# Altium PCB WCTopping.PcbDoc (part 2 of 2)
Units mil, origin at the board's own origin, x right, y up, seen from the top; angles counter-clockwise.
Board outline 6000 x 4000 mil, 2 copper layers (Top Layer, Bottom Layer); 59 components, 76 nets, 281 pads, 0 vias.
Unrouted connection lines stored in the file: 177.
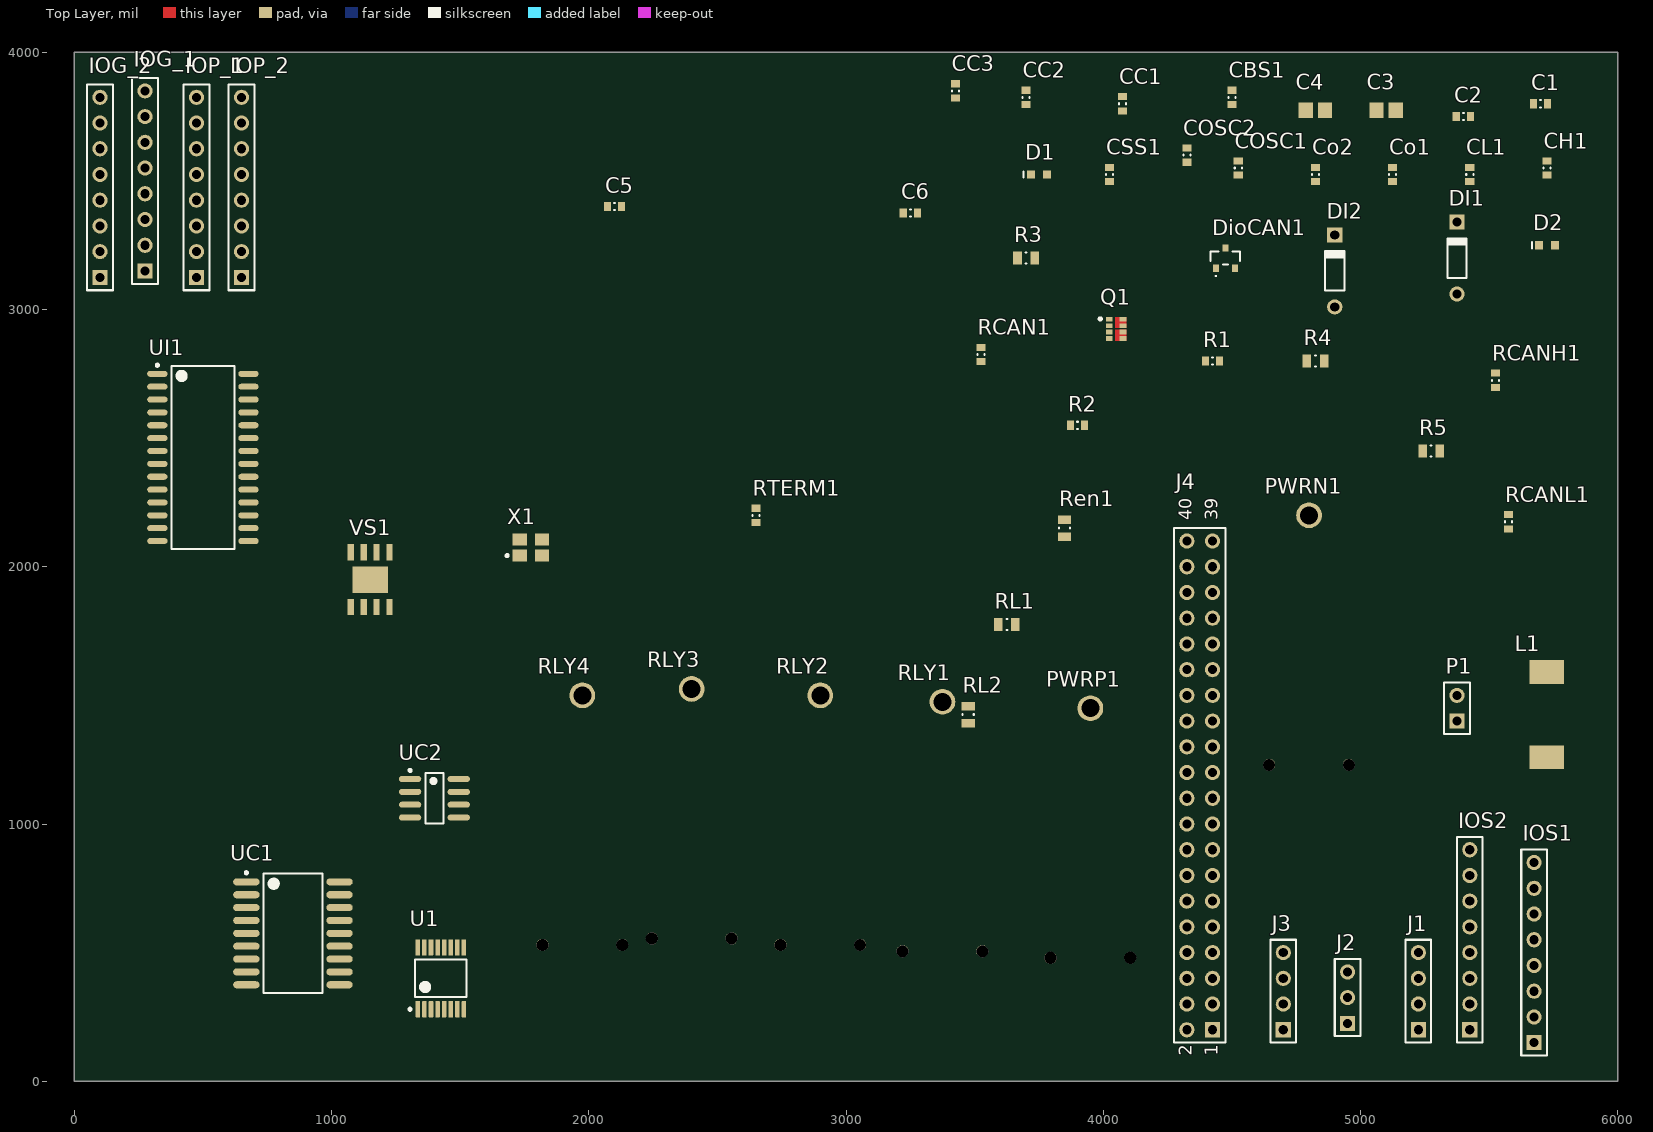
[diagram p0: Top Layer view]

## Part data (continued)
UC2: library part CMP-0186-00038-2, "High-Speed CAN Transceiver, 8-Pin SOIC, Extended Temperature", Code_IPC=SOIC127P600-8, Code_JEDEC=MS-012, ComponentLink1Description="Manufacturer URL", ComponentLink1URL=http://www.microchip.com/, ComponentLink2Description=Datasheet, ComponentLink2URL=http://ww1.microchip.com/downloads/en/DeviceDoc/21667F.pdf, ComponentLink3Description="Package Specification", ComponentLink3URL=http://www.microchip.com/stellent/groups/techpub_sg/documents/packagingspec/en012702.pdf, DatasheetVersion="revF, Jul-2010", PackageDescription="8-Lead Plastic Small Outline (SN) - Narrow, 3.90mm Body [SOIC]", PackageReference=SOIC-SN8, PackageVersion="revBB, Aug-2009", RevisionNote="URLs added. DatasheetVersion updated."
UI1: library part CMP-0186-00131-2, "16-Bit I/O Expander with Serial Interface, 28-Pin SOIC, Extended Temperature, Tape and Reel", Code_JEDEC=MS-013, ComponentLink1Description="Manufacturer URL", ComponentLink1URL=http://www.microchip.com/, ComponentLink2Description=Datasheet, ComponentLink2URL=http://ww1.microchip.com/downloads/en/DeviceDoc/21952b.pdf, ComponentLink3Description="Package Specification", ComponentLink3URL=http://www.microchip.com/stellent/groups/techpub_sg/documents/packagingspec/en012702.pdf, DatasheetVersion="revB, Feb-2007", PackageDescription="28-Lead Plastic Small Outline (SO) - Wide 7.50mm Body [SOIC]", PackageReference=SOIC-SO28, PackageVersion="revBB, Aug-2009", RevisionNote="URLs added. Sch pin type corrected."
VS1: Input Voltage MAX="23 V", Input Voltage MIN="4.75 V", Manufacturer="Monolithic Power Systems (MPS)", Manufacturer Part Number=MP2307DN-LF-Z, Maximum Operating Temperature="+ 85 C", Minimum Operating Temperature="- 40 C", Output Current="3 A", Output Voltage="0.925 V to 20 V", Package / Case="SOIC-8 EP", Supplier Part Number 1=946-MP2307DNLFZ, Supply Current="1.3 mA", Switching Frequency="340 kHz", Brand="Monolithic Power Systems (MPS)", ComponentLink1Description=https://datasheet.ciiva.com/12215/mp2307-r1-9-371737-12215450.pdf, ComponentLink1URL=https://datasheet.ciiva.com/12215/mp2307-r1-9-371737-12215450.pdf, Factory Pack Quantity=2500, Mounting Style=SMD/SMT, Number of Outputs="1 Output", Packaging=Reel, Pricing 1="1=4, 10=3.31, 50=3.31, 100=2.93, 1000=1.99, 10000=1.89 (USD)", Product Category="Voltage Regulators - Switching Regulators", RoHS=Details, Series=MP2307DN, Stock 1=1758, Supplier 1=Mouser, Topology=Buck, Type="Step-Down DC/DC Converter"
X1: library part CMP-0464-00001-2, "Crystal, 16 MHz, -30 to 85 degC, 3.2 x 2.5 x 0.9 mm SMD", Frequency Tolerance="+/-20 ppm", Load Capacitance="10 pF", Manufacturer=ITTI, Nominal Frequency="16 MHz", Operating Temperature="-30 to 85 degC", ComponentLink1Description="Manufacturer URL", ComponentLink1URL=http://www.itti-co.com, Drive Level="100 max. uw", Mounting Technology="Surface Mount", Overtone order=Fundamental, PackageDescription="4-Pin Hand Drawn, Body 3.2 x 2.5mm", PackageReference=21C00047-16.000MHz-4, PartNumber=21C00047-16.000MHz

## Nets (pads, with @x,y where several pads share a name; then routed paths per layer and width w, separated by ;. In a path a pad name is that pad's centre, name@x,y a point inside that pad or via, vN(x,y) a via of type N, cw(c..) or ccw(c..) an arc to the next point about the centre after c; other vN are vias at no path point)
3V3: C1.2 C6.2 CC2.2 J1.3 J3.1 J4.1 J4.17 U1.1 U1.2 U1.7 UC1.18
5V: C5.2 CC1.2 Co1.2 Co2.2 IOP_1.1 IOP_1.2 IOP_1.3 IOP_1.4 IOP_1.5 IOP_1.6 IOP_1.7 IOP_1.8 IOP_2.1 IOP_2.2 IOP_2.3 IOP_2.4 IOP_2.5 IOP_2.6 IOP_2.7 IOP_2.8 J4.2 J4.4 L1.2 R3.1 UC2.3 UI1.9
12V: C3.2 C4.2 DI1.2 DI2.2 PWRP1.1 Ren1.1 RL1.2 RL2.2 RLY1.1 RLY3.1 U1.16 VS1.2
\IO_RESET: J4.40 UC1.17 UI1.18
AUX_CL: J2.1
AUX_DA: J2.3
C\S\: J3.3 J4.24
CAN_RXD: R1.2 R2.2 UC1.2
CAN_TXD: UC1.1 UC2.1
CANH: DioCAN1.1 P1.1 RCANH1.2 RTERM1.2 UC2.7
CANL: DioCAN1.2 P1.2 RCANL1.2 RTERM1.1 UC2.6
FSYNC: J2.2
GND: C1.1 C2.1 C3.1 C4.1 C5.1 C6.1 CC1.1 CC2.1 CH1.2 CL1.1 Co1.1 Co2.1 COSC1.1 COSC2.2 CSS1.1 DioCAN1.3 IOG_1.1 IOG_1.2 IOG_1.3 IOG_1.4 IOG_1.5 IOG_1.6 IOG_1.7 IOG_1.8 IOG_2.1 IOG_2.2 IOG_2.3 IOG_2.4 IOG_2.5 IOG_2.6 IOG_2.7 IOG_2.8 J1.4 J3.2 J4.6 J4.9 J4.14 J4.20 J4.25 J4.30 J4.34 J4.39 PWRN1.1 Q1.1 Q1.3 R2.1 R4.2 R5.1 RCAN1.1 U1.8 U1.9 U1.15 UC1.9 UC2.2 UI1.10 UI1.15 UI1.16 UI1.17 VS1.4 X1.2 X1.4
GPIO2: J1.2 J4.3
GPIO3: J1.1 J4.5
GPIO4: J4.7 UC1.16 UI1.11
GPIO7: J4.26
GPIO12: J4.32 UI1.20
GPIO13: J4.33
GPIO14: J4.8
GPIO15: J4.10
GPIO16: J4.36 UI1.19
GPIO17: J4.11
GPIO18: J4.12
GPIO19: J4.35
GPIO20: J4.38 UC1.12
GPIO22: J4.15
GPIO23: J4.16
GPIO24: J4.18
GPIO25: J4.22
GPIO26: J4.37
GPIO27: J4.13
ID_SC: J4.28
ID_SD: J4.27
INT: J3.4
IOA_0: IOS1.1 UI1.21
IOA_1: IOS1.2 UI1.22
IOA_2: IOS1.3 UI1.23
IOA_3: IOS1.4 UI1.24
IOA_4: IOS1.5 UI1.25
IOA_5: IOS1.6 UI1.26
IOA_6: IOS1.7 UI1.27
IOA_7: IOS1.8 UI1.28
IOB_0: IOS2.1 UI1.1
IOB_1: IOS2.2 UI1.2
IOB_2: IOS2.3 UI1.3
IOB_3: IOS2.4 UI1.4
IOB_4: IOS2.5 UI1.5
IOB_5: IOS2.6 UI1.6
IOB_6: IOS2.7 UI1.7
IOB_7: IOS2.8 UI1.8
NetCBS1_1: CBS1.1 L1.1 VS1.3
NetCBS1_2: CBS1.2 VS1.1
NetCC3_1: CC3.1 R5.2
NetCC3_2: CC3.2 VS1.6
NetCH1_1: CH1.1 RCANH1.1
NetCL1_2: CL1.2 RCANL1.1
NetCOSC1_2: COSC1.2 UC1.7 X1.3
NetCOSC2_1: COSC2.1 UC1.8 X1.1
NetCSS1_2: CSS1.2 VS1.8
NetD1_1: D1.1 DI1.1 Q1.5 Q1.6 RLY2.1
NetD1_2: D1.2 RL1.1
NetD2_1: D2.1 DI2.1 Q1.7 Q1.8 RLY4.1
NetD2_2: D2.2 RL2.1
NetQ1_2: Q1.2 U1.5
NetQ1_4: Q1.4 U1.4
NetR1_1: R1.1 UC2.4
NetR3_2: R3.2 R4.1 VS1.5
NetRCAN1_2: RCAN1.2 UC2.8
NetRen1_2: Ren1.2 VS1.7
RELAY1: J4.29 U1.3
RELAY2: J4.31 U1.6
SPI_MISO: J4.21 UI1.14
SPI_MOSI: J4.19 UC1.14
SPI_MOSIA: UC1.15 UI1.13
SPI_SCLK: J4.23 UC1.13 UI1.12
pads on no net: C2.2 PWRN1.MH PWRP1.MH RLY1.MH RLY2.MH RLY3.MH RLY4.MH U1.10 U1.11 U1.12 U1.13 U1.14 UC1.3 UC1.4 UC1.5 UC1.6 UC1.10 UC1.11 UC2.5 VS1.EP

## Text inside footprints (layer, text, board x,y; h text height)
J4: Top Overlay "39" at 4445,2180 h50 r90; Top Overlay "40" at 4345,2180 h50 r90; Top Overlay "2" at 4345,100 h50 r90; Top Overlay "1" at 4445,100 h50 r90